# Altium PCB GP1247AI.PCBDOC (part 1 of 2)
Units mm, origin at the board's own origin, x right, y up, seen from the top; angles counter-clockwise.
Board outline 170 x 60 mm, 4 copper layers (Top Layer, Layer 1, Layer 2, Bottom Layer), stack 1.548 mm thick; 78 components, 46 nets, 283 pads, 156 vias.
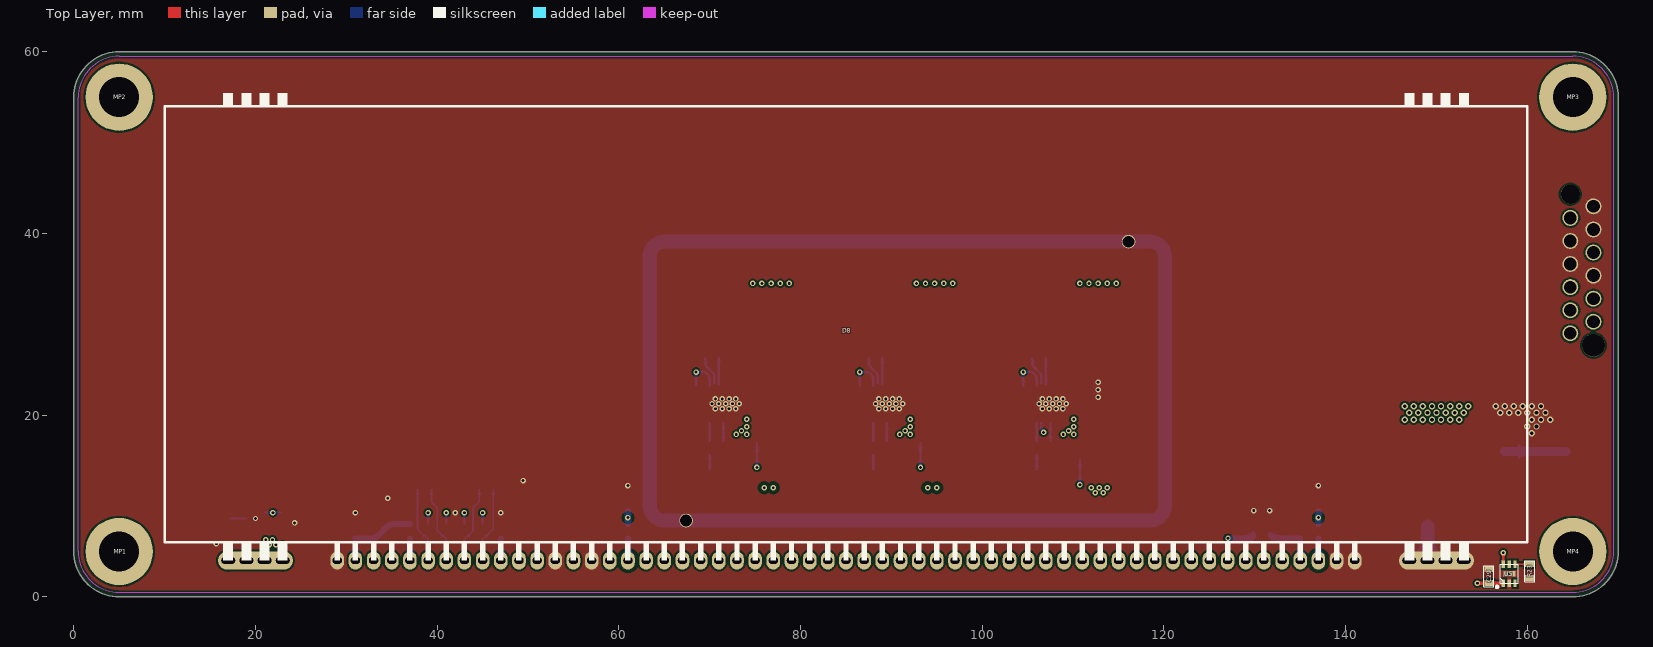
[diagram p0: Top Layer view]
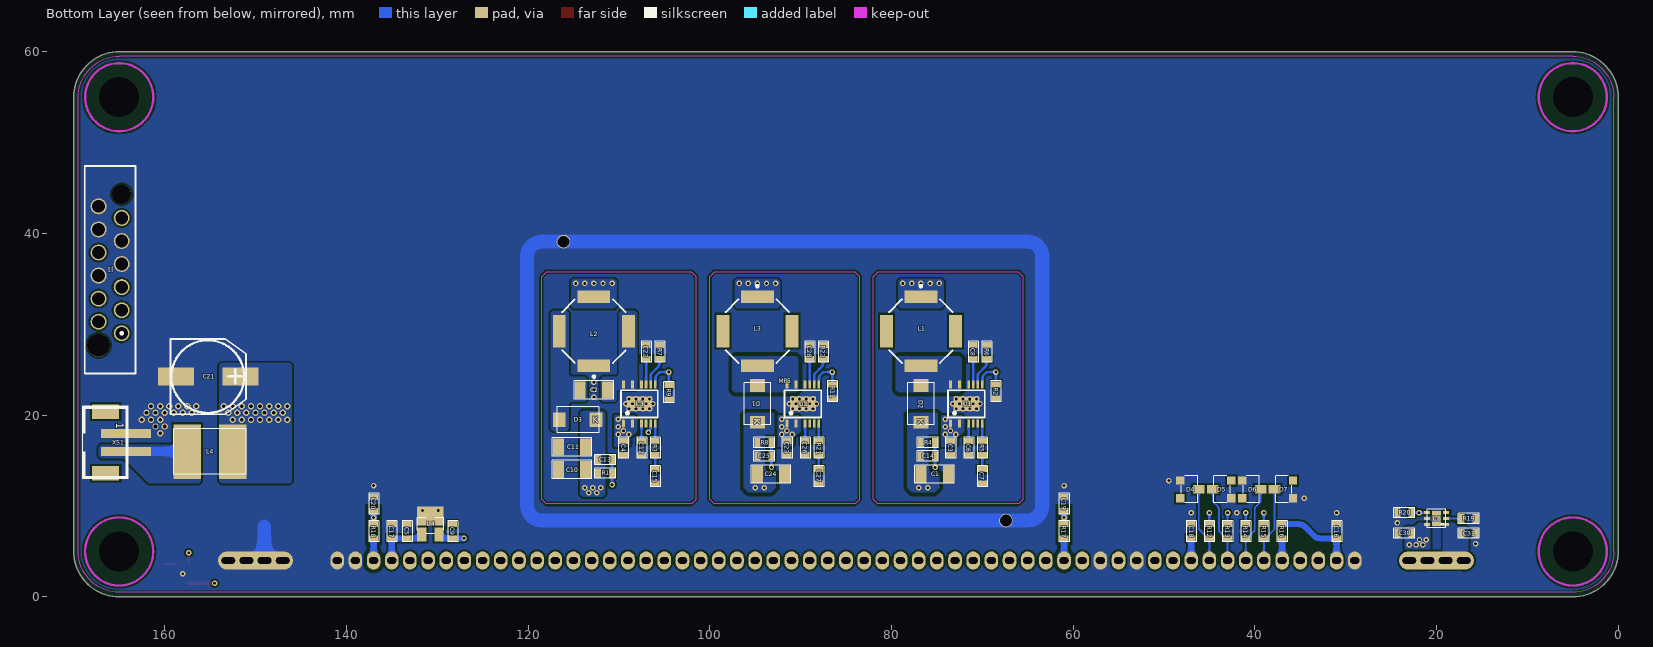
[diagram p1: Bottom Layer view, seen from below]
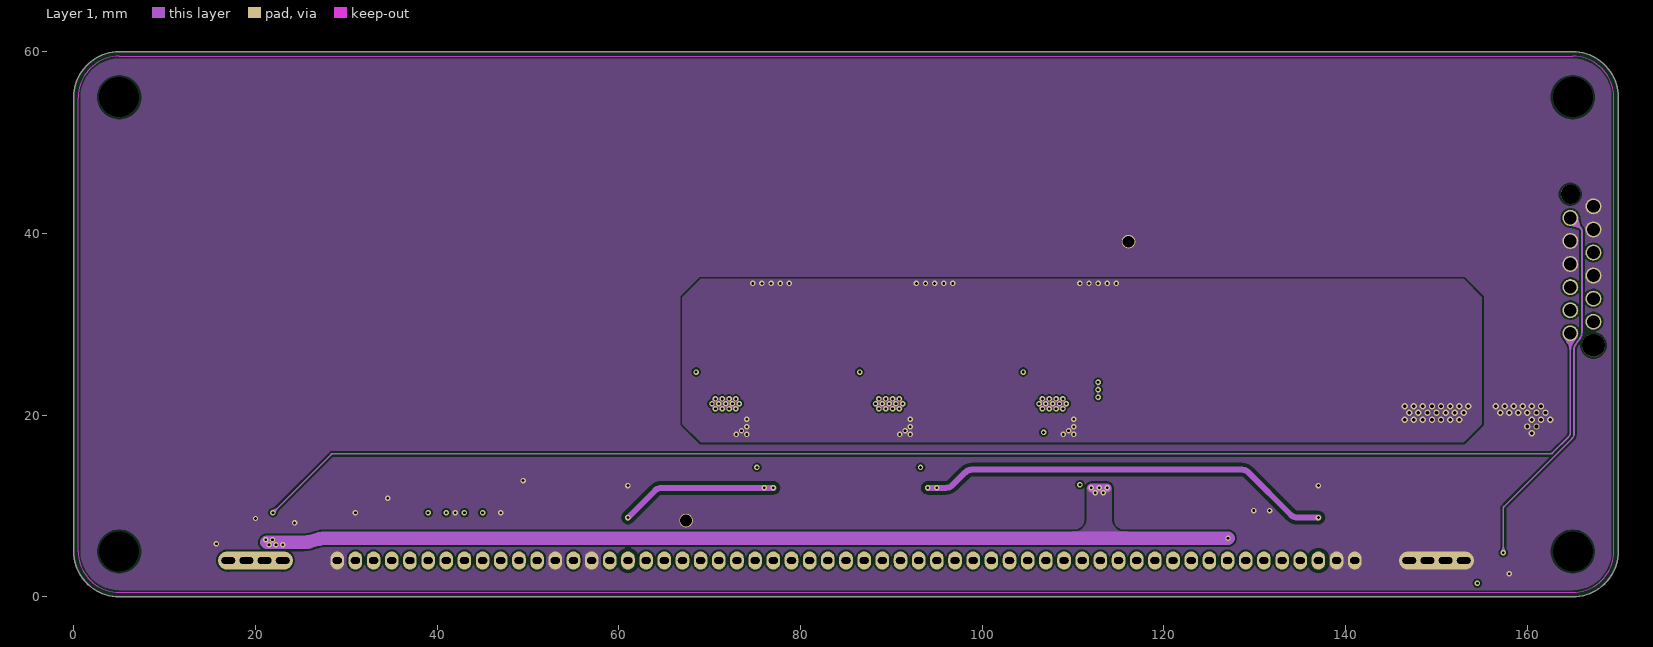
[diagram p2: Layer 1]
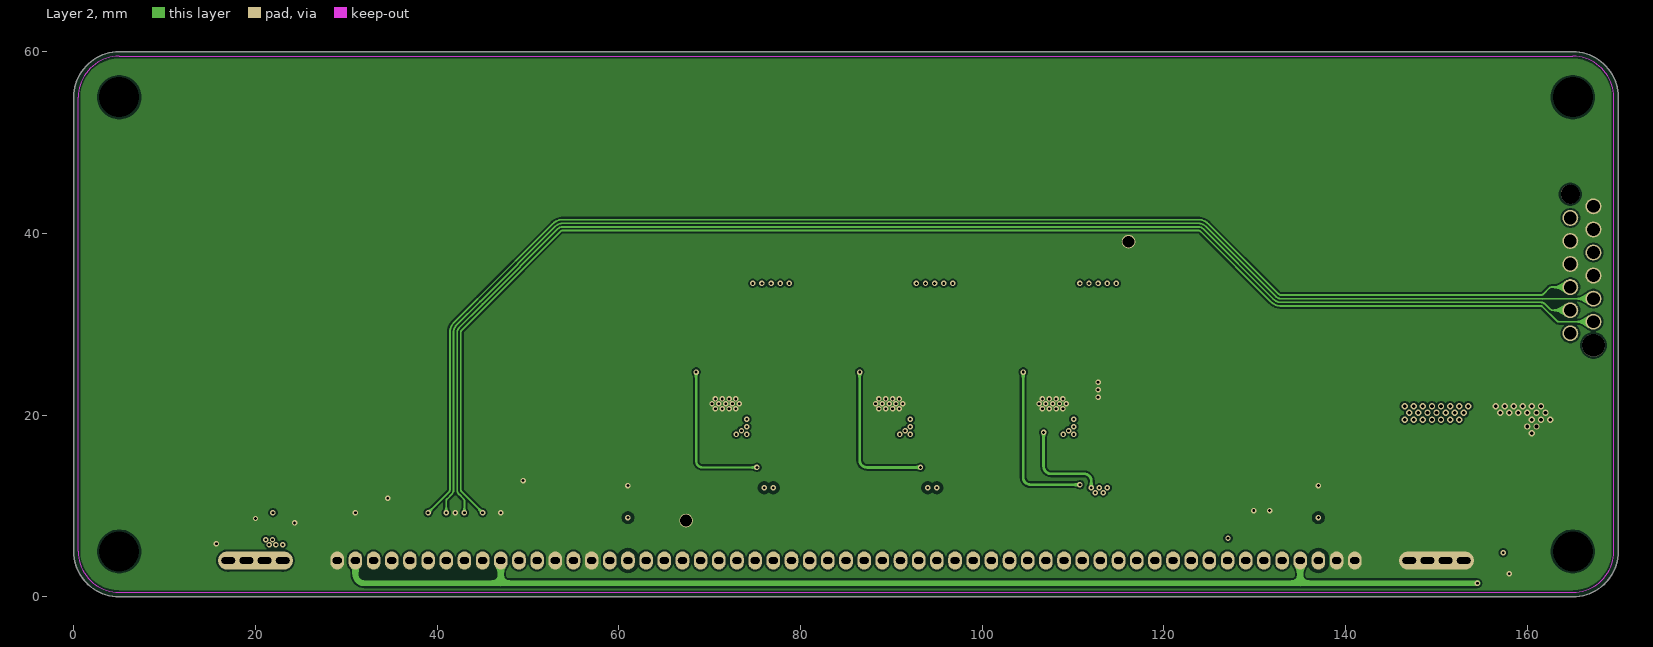
[diagram p3: Layer 2]
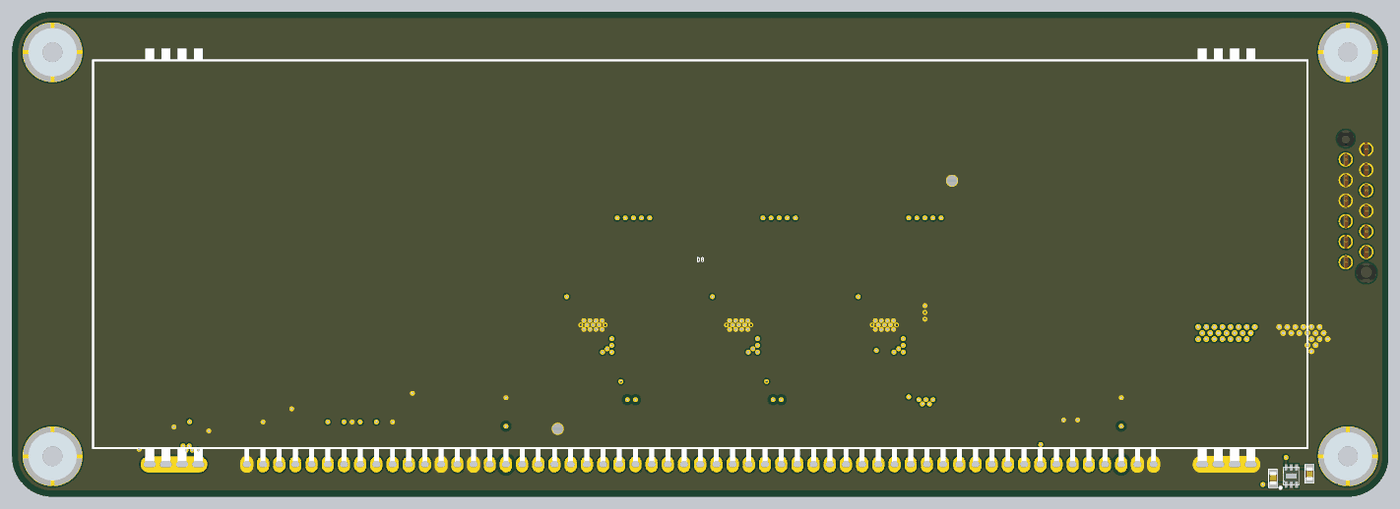
[diagram p4: 3D render of the assembled board from above, using the file's embedded part models]
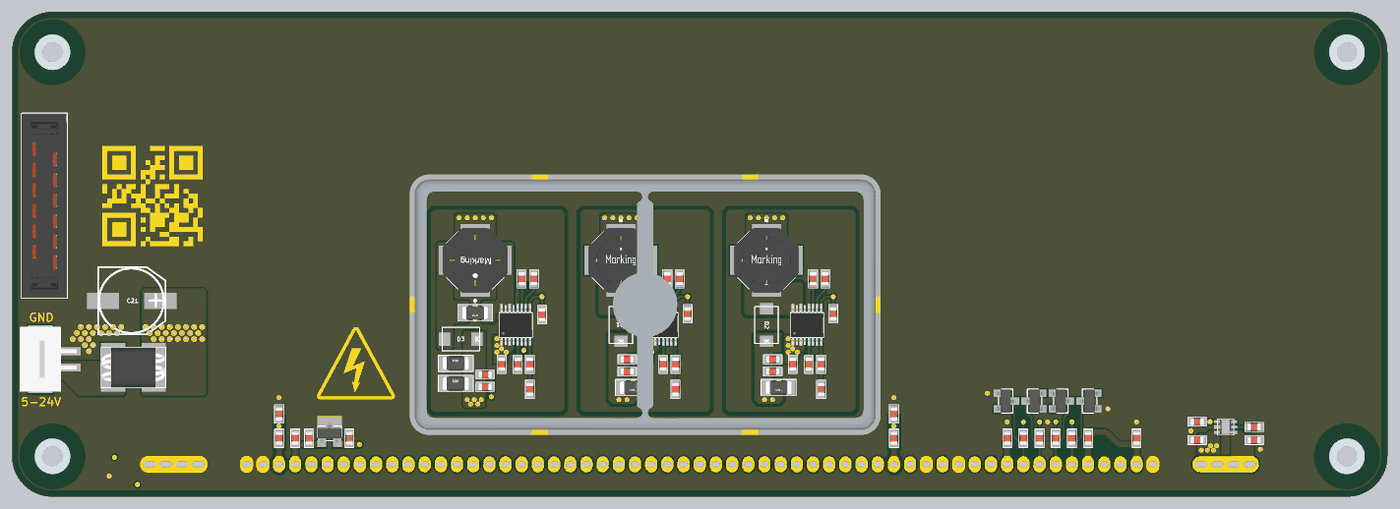
[diagram p5: 3D render of the assembled board from below, using the file's embedded part models]

## Layer stack, top to bottom
Top Solder: solder mask 0.0102, Solder Resist, Dk 3.5
Top Layer: signal copper 0.0356
Dielectric 2: prepreg 0.2083, PP-022, Dk 4.5
Layer 1: signal copper 0.035
Dielectric 1: core 0.9906, Core-042, Dk 4.6
Layer 2: signal copper 0.035
Dielectric 3: prepreg 0.2083, PP-022, Dk 4.5
Bottom Layer: signal copper 0.0356
Bottom Solder: solder mask 0.0102, Solder Resist, Dk 3.5

## Board outline
0,5 0,55 cw(c5,55) 5,60 165,60 cw(c165,55) 170,55 170,5 cw(c165,5) 165,0 5,0 cw(c5,5)

## Design rules (kind name [scope] priority, off if disabled: settings)
Clearance Clearance_1 [InNetClass('HIGH VOLTAGE')] p1: gap=0.4 ignorepadtopadclearanceinfootprint=FALSE
Clearance [All] p2: gap=0.2 ignorepadtopadclearanceinfootprint=TRUE except(0.15: SMDPad-Region)
HoleSize [All] p1: absolutevalues=TRUE maxlimit=5 minlimit=0.1 maxpercent=80.000 minpercent=20.000
MinimumSolderMaskSliver [All] p1: minsoldermaskwidth=0.05
PlaneConnect [All] p1: planeconnectstyle=Direct reliefexpansion=0.508 reliefentries=4 reliefconductorwidth=0.254 reliefairgap=0.254
PolygonConnect [All] p1: connectstyle=Direct reliefconductorwidth=0.254 reliefentries=4 polygonreliefangle="90 Angle" airgapwidth=0.254
RoomDefinition Connectors [InComponentClass('Connectors')] p1: confinementstyle=ConfineIn formatcopy=TRUE lockcomponents=FALSE outline 179,27 214,27 214,35 179,35
RoomDefinition Power [InComponentClass('Power')] p2: confinementstyle=ConfineIn formatcopy=TRUE lockcomponents=FALSE outline 178.943,51.435 194.564,51.435 194.564,57.277 178.943,57.277
RoutingVias [All] p1: holewidth=0.3 width=0.6 viastyle="Through Hole" minholewidth=0.2 minwidth=0.5 maxholewidth=1 maxwidth=1.5
SilkToSilkClearance [All] p1: silktosilkclearance=0.125
SolderMaskExpansion [IsVia] p1: expansion=0.08 istentingtop=FALSE soldermaskfromhole=TRUE
Width [All] p1: maxlimit=3 minlimit=0.125 preferedwidth=0.2
26 further rules are at their usual default settings.

## Classes and differential pairs
net class "HIGH VOLTAGE": NetD1_1 NetD2_1 NetD8_21 NetD8_59 VHG VHP
component class Power: C1 C2 C3 C4 C5 C6 C7 C8 C9 C10 C11 C12 C13 C14 C15 C22 C23 C24 C25 C26 C27 C28 D1 D2 D3 L1 L2 L3 MP5 R1 R2 R3 R4 R5 R6 R7 R8 R9 R11 R21 R22 U1 U2 U3 U4
component class Display: C16 C17 C18 C19 C20 C30 C31 D8 R16 R17 R18 R19 R20 U6
component class Connectors: C21 C29 D4 D5 D6 D7 J1 L4 MP1 MP2 MP3 MP4 R12 R13 R14 R15 R23 U5 XS1

## Components (designator, comment, footprint, x,y, rotation, side; value= is the part's Value field where it differs from the comment)
C1 "4.7µF/100V/X7S" 1206__R 73.753,13.5 r0 bottom
C2 "1µF/50V/X7R" 1206__R 111.251,22.75 r0 bottom
C3 "4.7µF/35V/0603" 0603__R 73.5,17.165 r270 bottom
C4 "4.7µF/35V/0603" 0603__R 109.5,17.165 r270 bottom
C5 "1µF/25V/X7R/0603" 0603__R 133.3,8 r270 bottom
C6 "1µF/50V/X5R/0603" 0603__R 71.5,15.616 r90 bottom
C7 "2.2NF/50V/0603" 0603__R 70,12.5 r90 bottom
C8 "2.2NF/50V/0603" 0603__R 71,27.75 r270 bottom
C9 "100NF/50V/0603" 0603__R 128.3,8 r270 bottom
C10 "47µF/25V/X5R" 1206__R 116.653,14 r180 bottom
C11 "47µF/25V/X5R" 1206__R 116.653,16.5 r180 bottom
C12 "1µF/50V/X5R/0603" 0603__R 107.5,15.616 r90 bottom
C13 "4.7pF/100V/0603" 0603__R 110.751,15.1 r0 bottom
C14 "4.7pF/100V/0603" 0603__R 75.201,15.5 r0 bottom
C15 "2.2NF/50V/0603" 0603__R 106,12.5 r90 bottom
C16 "100NF/50V/0603" 0603__R 31,8 r270 bottom
C17 "100NF/50V/0603" 0603__R 135,8 r270 bottom
C18 "100NF/50V/0603" 0603__R 47,8 r270 bottom
C19 "100NF/100V/0603" 0603__R 61,11 r270 bottom
C20 "100NF/100V/0603" 0603__R 137,11 r270 bottom
C21 "100µF/50V/ERS" AL-ERS8x8__R 158.75,24.25 r180 bottom
C22 "2.2NF/50V/0603" 0603__R 107,27.75 r270 bottom
C23 "4.7µF/35V/0603" 0603__R 91.5,17.165 r270 bottom
C24 "4.7µF/100V/X7S" 1206__R 91.753,13.5 r0 bottom
C25 "4.7pF/100V/0603" 0603__R 93.201,15.5 r0 bottom
C26 "1µF/50V/X5R/0603" 0603__R 89.5,15.616 r90 bottom
C27 "2.2NF/50V/0603" 0603__R 88,12.5 r90 bottom
C28 "2.2NF/50V/0603" 0603__R 89,27.75 r270 bottom
C29 "100NF/50V/0603" 0603__R 155.75,3.049 r270 top
C30 "100NF/50V/0603" 0603__R 24.299,7 r180 bottom
C31 "100NF/50V/0603" 0603__R 15.7,7 r0 bottom
D1 "STPS1H100A" SMA__R 94.75,21.25 r270 bottom
D2 "STPS1H100A" SMA__R 76.75,21.25 r270 bottom
D3 "STPS1H100A" SMA__R 114.535,19.5 r180 bottom
D4 "BZX84-C3V3" SOT-23-3__R 48.2,12.8 r180 bottom
D5 "BZX84-C3V3" SOT-23-3__R 42.6,10.87 r0 bottom
D6 "BZX84-C3V3" SOT-23-3__R 41.4,12.8 r180 bottom
D7 "BZX84-C3V3" SOT-23-3__R 35.8,10.87 r0 bottom
D8 "GP1247AI" GP1247AI 17,4 r0 top locked
J1 "490107671212" "490107671212_Permanent Application" 166,36 r270 bottom
L1 "6.8µH, 2.4A" WE-TPC_8020 76.75,29.25 r180 bottom
L2 "6.8µH, 1.45A" WE-TDC_8038 112.75,29.25 r0 bottom
L3 "6.8µH, 2.4A" WE-TPC_8020 94.75,29.25 r180 bottom
L4 "416Ohm, 5A" 7427511_WE-SUKW__R 155,16 r180 bottom
MP1 "M3, height 1mm" 9774010360_R 5,5 r0 top
MP2 "M3, height 1mm" 9774010360_R 5,55 r0 top
MP3 "M3, height 1mm" 9774010360_R 165,55 r0 top
MP4 "M3, height 1mm" 9774010360_R 165,5 r0 top
MP5 "3670570" 3670570 91.75,23.75 r0 bottom
R1 "1M00/0603" 0603__R 110.751,13.6 r0 bottom
R2 "33K0/0603" 0603__R 68.5,21.851 r90 bottom
R3 "100K/0603" 0603__R 106,15.616 r90 bottom
R4 "1M00/0603" 0603__R 75.201,17 r0 bottom
R5 "100K/0603" 0603__R 70,15.616 r90 bottom
R6 "20K0/0603" 0603__R 69.5,27.75 r270 bottom
R7 "20K0/0603" 0603__R 105.5,27.75 r270 bottom
R8 "1M00/0603" 0603__R 93.201,17 r0 bottom
R9 "470K/0603" 0603__R 104.5,21.75 r90 bottom
R11 "21K5/0603" 0603__R 86.5,21.851 r90 bottom
R12 "100R/0603" 0603__R 45,8 r270 bottom
R13 "100R/0603" 0603__R 43,6.451 r90 bottom
R14 "100R/0603" 0603__R 41,8 r270 bottom
R15 "100R/0603" 0603__R 39,6.451 r90 bottom
R16 "100K/0603" 0603__R 37,8 r270 bottom
R17 "10R0/0603" 0603__R 61,8 r270 bottom
R18 "10R0/0603" 0603__R 137,8 r270 bottom
R19 "43K0/0603" 0603__R 17.25,8.625 r180 bottom
R20 "100K/0603" 0603__R 22.75,9.275 r0 bottom
R21 "100K/0603" 0603__R 88,15.616 r90 bottom
R22 "20K0/0603" 0603__R 87.5,27.75 r270 bottom
R23 "100K/0603" 0603__R 160.25,3.6 r270 top
U1 "LT8361EMSE#PBF" MSOP-16/12__R 71.75,21.25 r90 bottom
U2 "LT8361EMSE#PBF" MSOP-16/12__R 89.75,21.25 r90 bottom
U3 "LT8361EMSE#PBF" MSOP-16/12__R 107.75,21.25 r90 bottom
U4 "LM3480IM3-3.3/NOPB" SOT-23-3_PW__R 130.75,7.881 r90 bottom
U5 "ISL76671AROZ-T7" SON65P210X200X80-7N 158,2.55 r90 top
U6 "NCP380HMUAJAATBG" SON65P200X200X55-7N 20,8.625 r0 bottom
XS1 "STIFTLEISTE_1X2_2MM_G_SMD" 1X2POL-2mm-G__R 169,17 r180 bottom

## Footprints (in the part's own frame and the unit in brackets; to place one, negate y for a bottom-side part, rotate by r counter-clockwise, add the part's x,y. Pads: shape width x height; smd on the part's side, far side on the other; paste and mask are expansions set on the pad)
1X2POL-2mm-G__R [mm] "JST: B2B-PH-SM4-TB(LF)(SN)"
  rect 3x1.6 smd: 0(2.5,-3.4) 0(2.5,3.4)
  rect 5.5x1 smd: 1(4.75,1) 2(4.75,-1)
  silkscreen extent -0.03,-4 5,3.98, body extent -0.03,-3.98 6.97,3.97, height 6.6
0603__R [mil]
  rect 26x39 smd: 1(0,0) 2(61,0)
  silkscreen extent -15,-22 76,22, body extent -15,-22 76,22, height 12
1206__R [mil]
  rect 47x74 smd: 1(0,0) 2(118,0)
  silkscreen extent -26,-40 144,40, body extent -26,-40 144,40, height 39
3670570 [mm] "Shielding Cabinet, SMT Frame Seamless, 57x31x6mm"
  round 1.5 hole 1.3: 1(-24.35,15.35) 1(24.35,-15.35)
  Top Layer region: -29.1,-1 -29.1,13.7 -29.1,13.936 -29.008,14.4 -28.827,14.837 -28.564,15.23 -28.23,15.564 -27.837,15.827 -27.4,16.008 -26.936,16.1 -26.7,16.1 -26.7,16.1 26.7,16.1 26.936,16.1 27.4,16.008 27.837,15.827 28.23,15.564 28.564,15.23 28.827,14.837 29.008,14.4 29.1,13.936 29.1,13.7 29.1,13.7 29.1,-1 27.6,-1 27.6,13.7 27.596,13.788 27.561,13.961 27.494,14.124 27.396,14.271 27.271,14.396 27.124,14.494 26.961,14.561 26.788,14.596 26.7,14.6 26.7,14.6 -26.7,14.6 -26.788,14.596 -26.961,14.561 -27.124,14.494 -27.271,14.396 -27.396,14.271 -27.494,14.124 -27.561,13.961 -27.596,13.788 -27.6,13.7 -27.6,13.7 -27.6,-1
  Top Layer region: -29.1,-0.25 -29.1,-13.7 -29.1,-13.936 -29.008,-14.4 -28.827,-14.837 -28.564,-15.23 -28.23,-15.564 -27.837,-15.827 -27.4,-16.008 -26.936,-16.1 -26.7,-16.1 -26.7,-16.1 -26.7,-16.1 26.7,-16.1 26.7,-16.1 26.936,-16.1 27.4,-16.008 27.837,-15.827 28.23,-15.564 28.564,-15.23 28.827,-14.837 29.008,-14.4 29.1,-13.936 29.1,-13.7 29.1,-13.7 29.1,-0.25 27.6,-0.25 27.6,-13.7 27.596,-13.788 27.561,-13.961 27.494,-14.124 27.396,-14.271 27.271,-14.396 27.124,-14.494 26.961,-14.561 26.788,-14.596 26.7,-14.6 26.7,-14.6 -26.7,-14.6 -26.788,-14.596 -26.961,-14.561 -27.124,-14.494 -27.271,-14.396 -27.396,-14.271 -27.494,-14.124 -27.561,-13.961 -27.596,-13.788 -27.6,-13.7 -27.6,-13.7 -27.6,-0.25
  body extent -28.5,-15.5 28.5,15.5, height 6
7427511_WE-SUKW__R [mm] "SMD EMI Suppression Ferrite Bead, body 5.5x5mm"
  rect 3x6 smd: 1(-2.5,0) 2(2.5,0)
  silkscreen extent -4,-2.5 4,2.5, body extent -4,-3 4,3, height 4.85
9774010360_R [mm] "M3 Thread Internal, Length 1mm"
  round 7.4 / inner round 0 / far side round 0 hole 4.4 unplated: 1(0,0)
  body extent -3,-3 3,3, height 1.01
"490107671212_Permanent Application" [mm] "REDFIT IDC SKEDD Connector, pitch 2.54mm, 12p"
  round 1.75 hole 1.4: 1(6.985,1.27) 2(5.715,-1.27) 3(4.445,1.27) 4(3.175,-1.27) 5(1.905,1.27) 6(0.635,-1.27) 7(-0.635,1.27) 8(-1.905,-1.27) 9(-3.175,1.27) 10(-4.445,-1.27) 11(-5.715,1.27) 12(-6.985,-1.27)
  round 2.1 hole 2.1 unplated: MH1(-8.315,1.27)
  round 2.5 hole 2.5 unplated: MH2(8.315,-1.27)
  silkscreen extent -11.41,-2.8 11.41,2.8, body extent -11.42,-2.8 11.41,2.8, height 10.5
AL-ERS8x8__R [mm]
  rect 4x2 smd: 1(0,0) 2(7.1,0)
  silkscreen extent -0.6,-4.15 7.7,4.15, body extent -2,-4.16 9.09,4.14, height 10.2
GP1247AI [mm]
  oval 2.25x2 hole 0.75 slot 1.5 at 0 deg mask+0.05: 1(0,0) 4(6,0) 62(130,0) 65(136,0)
  rect 4x2 hole 0.75 slot 1.5 at 0 deg mask+0.05: 2(2,0) 3(4,0) 63(132,0) 64(134,0)
  oval 1.5x2 hole 0.75 slot 1 at 0 deg mask+0.05: 5(12,0) 6(14,0) 7(16,0) 8(18,0) 9(20,0) 10(22,0) 11(24,0) 12(26,0) 13(28,0) 14(30,0) 15(32,0) 16(34,0) 17(36,0) 18(38,0) 19(40,0) 20(42,0) 21(44,0) 22(46,0) 23(48,0) 24(50,0) 25(52,0) 26(54,0) 27(56,0) 28(58,0) 29(60,0) 30(62,0) 31(64,0) 32(66,0) 33(68,0) 34(70,0) 35(72,0) 36(74,0) 37(76,0) 38(78,0) 39(80,0) 40(82,0) 41(84,0) 42(86,0) 43(88,0) 44(90,0) 45(92,0) 46(94,0) 47(96,0) 48(98,0) 49(100,0) 50(102,0) 51(104,0) 52(106,0) 53(108,0) 54(110,0) 55(112,0) 56(114,0) 57(116,0) 58(118,0) 59(120,0) 60(122,0) 61(124,0)
  silkscreen extent -7,0 143,51.45, body extent -7,2 143,50, height 10
MSOP-16/12__R [mm]
  oct 0.889x0.305 smd mask+0.025: 1(-2.15,1.75)
  rect 0.889x0.305 smd mask+0.025: 3(-2.15,0.75) 5(-2.15,-0.25) 6(-2.15,-0.75) 7(-2.15,-1.25) 8(-2.15,-1.75) 9(2.15,-1.75) 10(2.15,-1.25) 11(2.15,-0.75) 12(2.15,-0.25) 14(2.15,0.75) 16(2.15,1.75)
  rect 1.615x2.845 smd mask+0.025: 17(0,0)
  silkscreen extent -1.5,-2.02 1.5,2.02, body extent -2.45,-2.02 2.45,2.02, height 1.1
SMA__R [mm]
  rect 1.4x1.64 smd: 1(-2.015,0) 2(2.015,0)
  silkscreen extent -2.3,-1.45 2.3,1.45, body extent -2.72,-1.46 2.71,1.46, height 2.45
SON65P200X200X55-7N [mm]
  rect 0.7x0.35 smd mask+0.05: 1(-1.05,0.65) 2(-1.05,0) 3(-1.05,-0.65) 4(1.05,-0.65) 5(1.05,0) 6(1.05,0.65)
  rect 1x1.7 smd mask+0.05: 7(0,0)
  silkscreen extent -1,-1 1,1, body extent -1.05,-1 1.05,1, height 0.55
SON65P210X200X80-7N [mm]
  rect 0.8x0.35 smd: 1(-1.05,0.65) 2(-1.05,0) 3(-1.05,-0.65) 4(1.05,-0.65) 5(1.05,0) 6(1.05,0.65)
  rect 0.65x1.35 smd: 7(0,0)
  silkscreen extent -1.57,-1 1.05,1.45, body extent -1.1,-1 1.1,1, height 0.8
SOT-23-3__R [mil]
  rect 36x36 smd: 1(0,0) 2(0,-76)
  rect 50x36 smd: 3(80,-38)
  silkscreen extent 5,-96 75,20, body extent -9,-95 88,19, height 40
SOT-23-3_PW__R [mm]
  rect 1.5x1 smd mask+0.05: 1(-1.011,0.95) 2(-1.011,-0.95)
  rect 2.05x2.9 smd mask+0.05: 3(1.021,0)
  silkscreen extent -0.93,-1.45 0.85,1.45, body extent -1.25,-1.46 1.23,1.46, height 1.02
WE-TDC_8038 [mm] "SMT Shielded Coupled Inductor, 4-Leads, body 8x8mm"
  rect 3.6x1.4 smd: 1(0,3.8) 3(0,-3.8)
  rect 1.4x3.6 smd: 2(-3.8,0) 4(3.8,0)
  silkscreen extent -3.5,-3.5 3.5,5.12, body extent -4,-4 4,4, height 3.8
WE-TPC_8020 [mm] "Power Inductor, SMD, 4-Leads, body 8.0x8.0mm"
  rect 3.6x1.4 smd: 1(0,3.8) 2(0,-3.8)
  rect 1.4x3.6 smd: MP1(-3.8,0) MP2(3.8,0)
  silkscreen extent -3.5,-3.5 3.5,5.07, body extent -4,-4 4,4, height 1.8

## Part data
C1 C24: "Capacitor, 4.7µF/100V, 10%, Ceramic X7S, SMD, 1206", Manufacturer=Murata, Manufacturer Part Number=GRM31CC72A475KE11L, Supplier Part Number 1=490-18620-2-ND, ComponentLink1Description=https://search.murata.co.jp/Ceramy/image/img/A01X/G101/ENG/GRM31CC72A475KE11-01A.pdf?src-supplier=Digi-Key, ComponentLink1URL=https://search.murata.co.jp/Ceramy/image/img/A01X/G101/ENG/GRM31CC72A475KE11-01A.pdf?src-supplier=Digi-Key, Pricing 1="2000=0.29325 (USD)", RoHS Compliant=Yes, Stock=0, Supplier 1=Digi-Key, Text Field1=160347, Text Field7="Murata: GRM31CC72A475KE11L"
C2: library part 1µF/50V, "Capacitor, 1µF/50V, 10%, Ceramic X7R, SMD, 1206", Text Field1=80129, Text Field2=SMD, Text Field3=1206, Text Field4=1µF, Text Field5=50V, Text Field6=10%, Text Field7="1206, 50V, ±10%, X7R", Text Field8=10
C3 C4 C23: "Capacitor, 4.7µF, 35V, 10%, Ceramic X5R, SMD, 0603, Low ESR", Capacitance=4.7uF, Case Code (Imperial)=0603, Case Code (Metric)=1608, Dielectric=X5R, Dielectric Material=Ceramic, Manufacturer=TDK, Manufacturer Part Number=C1608X5R1V475K080AC, Max Operating Temperature=85°C, Min Operating Temperature=-55°C, Package Quantity=1, Supplier Part Number 1=445-9064-1-ND, Tolerance=10%, Voltage Rating=35V, Case/Package=0603, ComponentLink1Description=http://www.mouser.com/ds/2/400/lcc_commercial_general_en-837201.pdf?src-supplier=Mouser, ComponentLink1URL=http://www.mouser.com/ds/2/400/lcc_commercial_general_en-837201.pdf?src-supplier=Mouser, Depth=0.8mm, Height=0.8mm, Lead Free="Lead Free", Length=0.063inch, Mount="Surface Mount", Packaging="Tape and Reel", REACH SVHC="No SVHC", Resistor Type=Ceramic, RoHS Compliant=Yes, Series=C, Stock=37688, Supplier 1=Digi-Key, Termination=SMD/SMT, Text Field1=160313, Text Field7="TDK: C1608X5R1V475K080AC", Thickness=0.039inch, Voltage Rating (DC)=35V, Weight=7.1E-05oz, Width=0.031inch
C5: "Capacitor, 1µF, 25V, X7R, 10%, Ceramic, SMD, 0603", Capacitance=1µF, Manufacturer="Taiyo Yuden", Manufacturer Part Number=TMK107B7105KA-T, Operating Temperature="-55°C ~ 125°C", Package / Case="0603 (1608 Metric)", Ratings=-, Standard Package=1, Supplier Part Number 1=587-2984-2-ND, Temperature Coefficient=X7R, Tolerance=±10%, Voltage - Rated=25V, Applications="General Purpose", Catalog Drawings="xMK Series_0603_0.8", Category=Capacitors, ComponentLink1Description=https://datasheet.ciiva.com/15922/374tmk107b7105ka-t-15922376.pdf, ComponentLink1URL=https://datasheet.ciiva.com/15922/374tmk107b7105ka-t-15922376.pdf, ComponentLink2Description=https://datasheet.ciiva.com/30163/854tmk107b7105ka-t-30163691.pdf, ComponentLink2URL=https://datasheet.ciiva.com/30163/854tmk107b7105ka-t-30163691.pdf, ComponentLink3Description=https://datasheet.ciiva.com/2990/tmk107b7105ka-t-ss-2990064.pdf, ComponentLink3URL=https://datasheet.ciiva.com/2990/tmk107b7105ka-t-ss-2990064.pdf, ComponentLink4Description=https://datasheet.ciiva.com/133/tmk107b7105ka-t-ss-133732.pdf, ComponentLink4URL=https://datasheet.ciiva.com/133/tmk107b7105ka-t-ss-133732.pdf, Family="Ceramic Capacitors", Features=-, Height - Seated (Max)=-, Lead Spacing=-, Lead Style=-, Mounting Type="Surface Mount, MLCC", Online Catalog="M Series", Other Names=587-2984-6, Packaging=Digi-Reel®, Pricing 1="4000=0.0121, 8000=0.011, 12000=0.0105, 28000=0.01, 100000=0.0073 (USD)", Series=M, Size / Dimension="0.063\" L x 0.031\" W (1.60mm x 0.80mm)", Stock=1604000, Supplier 1=Digikey, Text Field1=138672, Text Field7="0603, 25V, ±10%, X7R", Thickness (Max)="0.035\" (0.90mm)"
C6 C12 C26: "Capacitor, 1µF, 50V, X5R, 10%, Ceramic, SMD, 0603", Text Field1=163284, Text Field2=SMD, Text Field3=0603, Text Field4=1µF, Text Field5=50V, Text Field6=X5R, Text Field7="0603, 50V, ±10%, X5R", Text Field8=4
C7 C8 C15 C22 C27 C28: "Capacitor, 2.2nF, 50V, 10%, Ceramic, SMD, 0603", Manufacturer=KEMET, Manufacturer Part Number="C0603C222K5RAC   TU", Supplier Part Number 1=1167798, ComponentLink1Description=http://www.kemet.com/kemet/web/homepage/kechome.nsf/vapubfiles/KEM_C1002_X7R_SMD.pdf/$file/KEM_C1002_X7R_SMD.pdf, ComponentLink1URL=http://www.kemet.com/kemet/web/homepage/kechome.nsf/vapubfiles/KEM_C1002_X7R_SMD.pdf/$file/KEM_C1002_X7R_SMD.pdf, ComponentLink2Description=http://www.farnell.com/cad/1455899.zip, ComponentLink2URL=http://www.farnell.com/cad/1455899.zip, Pricing 1="1=0,009, 10=0,009, 100=0,008, 500=0,006, 1000=0,005, 2500=0,005 (EUR)", RoHS=YES, Stock 1=3711, Supplier 1=Farnell, Text Field1=102033, Text Field7="0603, 50V, ±10%, X5R"
C9 C16 C17 C18 C29 C30 C31: "Capacitor, 100nF, 50V, 10%, Ceramic XR7, SMD, 0603", Betriebstemperaturbereich="-55°C bis +125", Capacitor Terminals=SMD, Kapazitätstoleranz="± 10%", Manufacturer=KEMET, Manufacturer Part Number=C0603X104K5RACTU, Min Betriebstemperatur=-55, Supplier Part Number 1=1414028, Temperatur, Betriebs- max.=125, Toleranz +=10%, Anschlusstyp="Surface Mount (SMD, SMT)", Breite/Weite=0.8, ComponentLink1Description=http://www.farnell.com/datasheets/75233.pdf, ComponentLink1URL=http://www.farnell.com/datasheets/75233.pdf, ComponentLink2Description=http://www.farnell.com/cad/1558668.zip, ComponentLink2URL=http://www.farnell.com/cad/1558668.zip, Dielektrische Charakteristik=X7R, Gehäusetyp=0603, Kapazitätswert=0.1, Kondensatorgehäusestil="0603 [1608 Metric]", Länge/Höhe, Außen-=1.6, Nennspannung=50, Pin, Anzahl der=2, Pricing 1="10=0,084, 100=0,042, 500=0,029, 1000=0,021, 4000=0,016 (EUR)", RoHS=YES, Serie=FT, Stock 1=97613, Supplier 1=Farnell, SVHC="No SVHC (18-Jun-2012)", Text Field1=113024, Text Field7="0603, 50V, ±10%, X7R", Tiefe, Außen=0.8, Toleranz -=10%, VDC Nennspannung=50
C10 C11: "Capacitor, 47µF/25V, 20%, Ceramic X5R, SMD, 1206", Capacitance=47uF, Case Code (Imperial)=1206, Case Code (Metric)=3216, Dielectric=X5R, Dielectric Material=Ceramic, Manufacturer=TDK, Manufacturer Part Number=C3216X5R1E476M160AC, Max Operating Temperature=85°C, Min Operating Temperature=-55°C, Package Quantity=1, Supplier Part Number 1=445-8047-2-ND, Tolerance=20%, Voltage=25V, Case/Package=1206, ComponentLink1Description=https://product.tdk.com/info/en/documents/chara_sheet/C3216X5R1E476M160AC.pdf?src-supplier=Digi-Key, ComponentLink1URL=https://product.tdk.com/info/en/documents/chara_sheet/C3216X5R1E476M160AC.pdf?src-supplier=Digi-Key, ComponentLink2Description=https://product.tdk.com/info/en/catalog/datasheets/mlcc_commercial_general_en.pdf?src-supplier=Digi-Key, ComponentLink2URL=https://product.tdk.com/info/en/catalog/datasheets/mlcc_commercial_general_en.pdf?src-supplier=Digi-Key, ComponentLink3Description=http://www.tdk.com/pdf/general_B11.pdf?src-supplier=Future+Electronics, ComponentLink3URL=http://www.tdk.com/pdf/general_B11.pdf?src-supplier=Future+Electronics, Composition=Ceramic, Depth=1.6mm, Height=1.6mm, Lead Free="Lead Free", Length=3.2mm, Mount="Surface Mount", Packaging="Tape and Reel", Pricing 1="2000=0.385, 4000=0.37125, 10000=0.3575, 14000=0.35063 (USD)", REACH SVHC="No SVHC", Stock=216000, Supplier 1=Digi-Key, Termination=SMD/SMT, Text Field1=153145, Text Field7="TDK: C3216X5R1E476M160AC", Thickness=1.6mm, Voltage Rating=25V, Voltage Rating (DC)=25V, Weight=0.000571oz, Width=0.063inch
C13 C14 C25: library part 4.7NF/50V/0603, "Capacitor, 4.7pF, 100V, 10%, Ceramic, SMD, 0603", Text Field1=87196, Text Field2=SMD, Text Field3=0603, Text Field4=4.7nF, Text Field5=50V, Text Field6=10%, Text Field7="0603,50V, ±10%, X7R", Text Field8=4
C19 C20: library part 100NF/50V/0603, "Capacitor, 100nF, 100V, 10%, Ceramic XR7, SMD, 0603", Betriebstemperaturbereich="-55°C bis +125", Capacitor Terminals=SMD, Kapazitätstoleranz="± 10%", Manufacturer=KEMET, Manufacturer Part Number=C0603X104K5RACTU, Min Betriebstemperatur=-55, Supplier Part Number 1=1414028, Temperatur, Betriebs- max.=125, Toleranz +=10%, Anschlusstyp="Surface Mount (SMD, SMT)", Breite/Weite=0.8, ComponentLink1Description=http://www.farnell.com/datasheets/75233.pdf, ComponentLink1URL=http://www.farnell.com/datasheets/75233.pdf, ComponentLink2Description=http://www.farnell.com/cad/1558668.zip, ComponentLink2URL=http://www.farnell.com/cad/1558668.zip, Dielektrische Charakteristik=X7R, Gehäusetyp=0603, Kapazitätswert=0.1, Kondensatorgehäusestil="0603 [1608 Metric]", Länge/Höhe, Außen-=1.6, Nennspannung=50, Pin, Anzahl der=2, Pricing 1="10=0,084, 100=0,042, 500=0,029, 1000=0,021, 4000=0,016 (EUR)", RoHS=YES, Serie=FT, Stock 1=97613, Supplier 1=Farnell, SVHC="No SVHC (18-Jun-2012)", Text Field1=113024, Text Field7="0603, 50V, ±10%, X7R", Tiefe, Außen=0.8, Toleranz -=10%, VDC Nennspannung=50
C21: "Capacitor, 100µF, Low ESR, 105 °C, 50V, 20%, Al-Elektrolyt, SMD, Größe ERS8x8", Text Field1=80894, Text Field2=SMD, Text Field3="Größe ERS8x8", Text Field4="100µF/ERS Low ESR", Text Field5=50V, Text Field6=20%, Text Field7=Al-Elektrolyt
D1 D2 D3: "DIODE SCHOTTKY 100V 1A SMA", Capacitance @ Vr, F=-, Current - Average Rectified (Io)=1A, Current - Reverse Leakage @ Vr="4µA @ 100V", Manufacturer=STMicroelectronics, Package / Case="DO-214AC, SMA", Supplier Device Package=SMA, Supplier Part Number 1=497-3209-6-ND, Voltage - DC Reverse (Vr) (Max)=100V, Voltage - Forward (Vf) (Max) @ If="770mV @ 1A", Category="Discrete Semiconductor Products", ComponentLink1Description=http://www.st.com/internet/com/TECHNICAL_RESOURCES/TECHNICAL_LITERATURE/DATASHEET/CD00001304.pdf, ComponentLink1URL=http://www.st.com/internet/com/TECHNICAL_RESOURCES/TECHNICAL_LITERATURE/DATASHEET/CD00001304.pdf, Diode Type=Schottky, Manufacturer Part Number=STPS1H100A, Mounting Type="Surface Mount", Packaging=Digi-Reel®, Pricing 1="1=0.41, 10=0.345, 25=0.3024, 100=0.259, 250=0.2246, 500=0.19026, 1000=0.14667, 2500=0.1341 (EUR)", Reverse Recovery Time (trr)=-, RoHS="RoHS Compliant", Speed="Fast Recovery =< 500ns, > 200mA (Io)", Stock 1=111470, Supplier 1=Digi-Key, Text Field1=111565, Text Field7="STMicroelectronics: STPS1H100A"
D4 D5 D6 D7: "DIODE ZENER 3.3V 250MW SOT23", Current - Reverse Leakage @ Vr="5µA @ 1V", Manufacturer="Nexperia USA Inc.", Manufacturer Part Number=BZX84-C3V3,215, Operating Temperature="-65°C ~ 150°C", Package / Case="TO-236-3, SC-59, SOT-23-3", Power - Max=250mW, Supplier Device Package="TO-236AB (SOT23)", Supplier Part Number 1=1727-2937-2-ND, Tolerance=±5%, Voltage - Forward (Vf) (Max) @ If="900mV @ 10mA", Category="Discrete Semiconductor Products", ComponentLink1Description=http://assets.nexperia.com/documents/data-sheet/BZX84_SER.pdf, ComponentLink1URL=http://assets.nexperia.com/documents/data-sheet/BZX84_SER.pdf, Mounting Type="Surface Mount", Packaging="Tape & Reel (TR)", Part Status=Active, Pricing 1="3000=0.02273, 6000=0.0205, 15000=0.01782, 30000=0.01604, 75000=0.01426, 150000=0.01185 (EUR)", RoHS="RoHS Compliant", Stock 1=0, Supplier 1=Digi-Key, Text Field1=139997, Text Field7="Nexperia: BZX84-C3V3,215"
D8: "253*63 Pixels SPI VFD Matrix Display"
J1: "WR-WST REDFIT IDC SKEDD, pitch 2.54mm, 12p", Contact Resistance=10mΩ, Manufacturer="Wurth Elektronik", Operating Temperature Max=105°C, Operating Temperature Min=-25°C, Rated Current=1A, Working Voltage=100VAC, Category="Wire-to-Board Connectors", ComponentLink1Description="Website Link", ComponentLink1URL=https://www.we-online.com/redexpert/article/490107671212?ad, ComponentLink2Description="Datasheet Link", ComponentLink2URL=https://www.we-online.com/redexpert/spec/490107671212?ad, Gender=Transition, Manufacturer Part Number=490107671212, Match Code=WR-WST, Mount="Press Fit", Number of Pins=12, Packaging=Tube, Pitch=2.54mm
L1 L3: library part 7440700068, "WE-TPC SMT Tiny Power Inductor, size 8020, 6.8µH, 2.4A, 68mΩ", Case/Size Code=8020, DC Resistance=56mΩ, DC Resistance Max=68mΩ, Inductance=6.8µH, Manufacturer="Wurth Elektronik", Operating Temperature Max=125°C, Operating Temperature Min=-40°C, Rated Current=2.4A, Saturation Current=1.8A, Self Resonant Frequency=55MHz, Category="Shielded Power Inductors", ComponentLink1Description="Website Link", ComponentLink1URL=https://www.we-online.com/redexpert/article/7440700068?ad, ComponentLink2Description="Datasheet Link", ComponentLink2URL=https://www.we-online.com/redexpert/spec/7440700068?ad, Height=1.8mm, Length=8mm, Manufacturer Part Number=7440700068, Match Code=WE-TPC, Mount="Surface Mount", Packaging="Tape and Reel", Width=8mm
L2: library part 74489440068, "WE-TDC SMT Shielded Coupled Inductor, size 8038, 6.8µH, 1.45A, 100mΩ", Case/Size Code=8038, DC Resistance 1=88mΩ, DC Resistance Max 1=100mΩ, Inductance 1=6.8µH, Manufacturer="Wurth Elektronik", Operating Temperature Max=125°C, Operating Temperature Min=-40°C, Rated Current 1=1.45A, Rated Voltage=80V, Saturation Current=3.2A, Self Resonant Frequency=25MHz, Category="Coupled Power Inductors", ComponentLink1Description="Website Link", ComponentLink1URL=https://www.we-online.com/redexpert/article/74489440068?ad, ComponentLink2Description="Datasheet Link", ComponentLink2URL=https://www.we-online.com/redexpert/spec/74489440068?ad, DC Resistance 2=88mΩ, DC Resistance Max 2=100mΩ, Height=3.8mm, Inductance 2=6.8µH, Length=8mm, Manufacturer Part Number=74489440068, Match Code=WE-TDC, Mount="Surface Mount", Packaging="Tape and Reel", Rated Current 2=1.45A, Width=8mm
L4: library part 7427511, "WE-SUKW SMT EMI Suppression 5-Hole Ferrite Bead, , 416Ohm, 5A", DC Resistance max.=11mOhm, Manufacturer="Wurth Elektronik", Operating Temperature="-40 to +125degC", Rated Current=5A, ComponentLink1Description=Manufacturer, ComponentLink1URL=http://www.we-online.de, ComponentLink2Description=Datasheet, ComponentLink2URL=https://www.we-online.com/catalog/datasheet/7427511.pdf, Height=4.6mm, Impedance @25MHz=272Ohm, Impedance @100MHz=416Ohm, Impedance max.=440Ohm, Impedance max. Test Condition=100MHz, Length=8mm, Manufacturer Part Number=7427511, Mounting Technology=SMT, Packaging="Tape and Reel", Published Date="April 2020", Text Field1=156774, Text Field7="Würth: 7427511", Width=5mm
MP1 MP2 MP3 MP4: library part 9774010360, "SMT Steel Spacer with internal Thread M3 WA-SMSI, height 1mm", Manufacturer="Wurth Electronics", Operating Temperature="-55 to 150 degC", Supplier Part Number 1=710-9774010360, ComponentLink1Description=Manufacturer, ComponentLink1URL=http://www.we-online.de, ComponentLink2Description=Datasheet, ComponentLink2URL=https://katalog.we-online.de/em/datasheet/9774010360.pdf, Manufacturer Part Number=9774010360, Material=Steel, Mounting Technology=SMT, Packaging=Bulk, Part Number=9774010360, Pricing 1="1=2.54, 10=2.41, 50=2.28, 100=2.11, 1000=2.11, 10000=2.11 (USD)", Published Date="November 2018", Publisher="Wurth Elektronik", Solder Cream Thickness="150 um", Stock=200, Supplier 1=Mouser, Surface=Tin, Text Field1=148883, Text Field7="Würth: 9774010360", Thread=M3, Tightening Torque="0.5 Nm"
MP5: "WE-SHC Shielding Cabinet, SMT Frame Seamless, Tin Plated, Tray, 57x31x6mm", Manufacturer="Wurth Elektronik", Operating Temperature Max=125°C, Operating Temperature Min=-40°C, Base Material=Steel, Category="EMC Shielding", ComponentLink1Description="Website Link", ComponentLink1URL=https://www.we-online.com/redexpert/article/3670570?ad, ComponentLink2Description="Datasheet Link", ComponentLink2URL=https://www.we-online.com/redexpert/spec/3670570?ad, Height=6mm, Length=57mm, Manufacturer Part Number=3670570, Match Code=WE-SHC, Mount="Surface Mount", Packaging=Tray, Plating="Tin Plated", Type="SMT Frame Seamless", Width=31mm
R1 R4 R8: "Resistor, 1M00, 0,1 W, 1,0 %, TK50, Metallschicht, SMD, 0603", Text Field1=69900, Text Field2=SMD, Text Field3=0603, Text Field4=1M00, Text Field5=0.1W, Text Field6="1%, TK100", Text Field7="0603, 0,1 W, 1,0 %, TK50", Text Field8=4
R2: "Resistor, 33K, 0,1 W, 1,0 %, TK50, Metallschicht, SMD, 0603", Text Field1=86418, Text Field2=SMD, Text Field3=0603, Text Field4=33K, Text Field5=0.1W, Text Field6=TK100, Text Field7="0603, 0,1 W, 1,0 %, TK50", Text Field8=4
R3 R5 R16 R20 R21 R23: "Resistor, 100K, 0.1W, 1%, TK50, Metallschicht, SMD, 0603", Text Field1=70755, Text Field2=SMD, Text Field3=0603, Text Field4=100K, Text Field5=0.1W, Text Field6="1%, TK50", Text Field7="0603, 0,1 W, 1,0 %, TK50", Text Field8=4
R6 R7 R22: "Resistor, 20K0, 0.063W, 1%, TK100, Metallschicht, SMD, 0603", Text Field1=82523, Text Field2=SMD, Text Field3=0603, Text Field4=20K0, Text Field5=0.063W, Text Field6="1%, TK100", Text Field7="0603, 0,1 W, 1,0 %, TK100", Text Field8=4
R9: "Resistor, 470K, 0.1W, 1%, TK50, Metallschicht, SMD, 0603", Text Field1=114671, Text Field2=SMD, Text Field3=0603, Text Field4=470K, Text Field5=0.1W, Text Field6="1%, TK50", Text Field7="0603, 0,1 W, 1,0 %, TK50", Text Field8=4
R11: library part 22K0/0603, "Resistor, 21K5, 0.1W, 1%, TK50, Metallschicht, SMD, 0603", Text Field1=73115, Text Field2=SMD, Text Field3=0603, Text Field4=22K0, Text Field5=0.1W, Text Field6="1%, TK50", Text Field7="0603, 0,1 W, 1,0 %, TK50", Text Field8=4
R12 R13 R14 R15: "Resistor, 100R, 0.1W, 1%, TK50, Metallschicht, SMD, 0603", Text Field1=67270, Text Field7="0603, 0,1 W, 1,0 %, TK50"
R17 R18: "Resistor, 10R0, 0.063W, 1%, TK200, Metallschicht, SMD, 0603", Manufacturer=VISHAY, Manufacturer Part Number="MCT 0603-50 1% P5 10R0", Power Rating=100, Resistance=10, Resistance Tolerance="± 1%", Resistor Case Style="0603 [1608 Metric]", Resistor Element Material="Thin Film", Supplier Part Number 1=06X6013, ComponentLink1Description=http://www.farnell.com/datasheets/1718110.pdf, ComponentLink1URL=http://www.farnell.com/datasheets/1718110.pdf, Pricing 1="50=0,063, 250=0,048, 500=0,042, 1000=0,038, 5000=0,035 (USD)", Product Range="VISHAY - MCT Series", RoHS=YESX, Stock 1=4700, Supplier 1=Newark, Text Field1=70916, Text Field7="0603, 0,063W, 1,0 %, TK200"
R19: "Resistor, 43K0, 0,1 W, 1,0 %, TK50,  Metallschicht, SMD, 0603", Text Field1=69417, Text Field2=SMD, Text Field3=0603, Text Field4=43K0, Text Field5=0,1W, Text Field6="1%, TK50", Text Field7="0603, 0,1 W, 1,0 %, TK50", Text Field8=4
U1 U2 U3: "Conv DC-DC 2.8V to 60V Step Up Single-Out 100V 2A Automotive 12-Pin MSOP EP Tube", Manufacturer_Name="Analog Devices", Mouser Part Number=584-LT8361EMSE#PBF, Datasheet Link=https://www.mouser.fi/datasheet/2/609/lt8361-1568840.pdf, Geometry.Height=1.1mm, Manufacturer_Part_Number=LT8361EMSE#PBF, Mouser Price/Stock=https://www.mouser.co.uk/ProductDetail/Analog-Devices/LT8361EMSEPBF?qs=y6ZabgHbY%252ByVuSTCW6h07w%3D%3D
U4: "LDO, SOT-23, 3V3 OUT 100mA, Vinmax 30V, SMD", Current - Limit (Min)=-, Current - Output=100mA, Manufacturer="Texas Instruments", Operating Temperature="-40°C ~ 125°C", Package / Case="TO-236-3, SC-59, SOT-23-3", Supplier Device Package=SOT-23-3, Supplier Part Number 1=LM3480IM3-3.3/NOPBTR-ND, Voltage - Dropout (Typical)="0.9V @ 100mA", Voltage - Input="Up to 30V", Voltage - Output=3.3V, Category="Integrated Circuits (ICs)", ComponentLink1Description=http://www.ti.com/lit/ds/symlink/lm3480.pdf, ComponentLink1URL=http://www.ti.com/lit/ds/symlink/lm3480.pdf, Manufacturer Part Number=LM3480IM3-3.3/NOPB, Mounting Type="Surface Mount", Number of Regulators=1, Packaging="Tape & Reel (TR)", Part Status=Active, Pricing 1="1000=0.3183 (EUR)", Regulator Topology="Positive Fixed", RoHS="RoHS Compliant", Stock 1=23000, Supplier 1=Digi-Key, Text Field1=131797, Text Field7="TI: LM3480IM3-3.3/NOPB"
U5: "Light to Analog Sensors (Voltage) Low Power, <100 Lux Optimized, Analog Output Ambient Light Sensor", Manufacturer_Name="Renesas Electronics", Mouser Part Number=968-ISL76671AROZ-T7, Datasheet Link=https://www.renesas.com/en-us/www/doc/datasheet/isl76671.pdf, Geometry.Height=0.8mm, Manufacturer_Part_Number=ISL76671AROZ-T7, Mouser Price/Stock=https://www.mouser.co.uk/ProductDetail/Renesas-Intersil/ISL76671AROZ-T7?qs=9fLuogzTs8KH%2F0coQfRtPw%3D%3D
U6: "ON SEMICONDUCTOR - NCP380HMUAJAATBG - Power Load Switch, Current Limiting, High Side, Active High, 1 Output, 5.5V, UDFN-6", Manufacturer_Name=onsemi, Mouser Part Number=863-NCP380HMUAJAATBG, Datasheet Link=http://www.onsemi.com/pub/Collateral/NCP380-D.PDF, Geometry.Height=0.55mm, Manufacturer_Part_Number=NCP380HMUAJAATBG, Mouser Price/Stock=https://www.mouser.co.uk/ProductDetail/onsemi/NCP380HMUAJAATBG?qs=YeOvDzlQW72pe7df1sK96A%3D%3D
XS1: Color=Natural, Manufacturer="JST Sales America Inc", Manufacturer Part Number=B2B-PH-SM4-TB(LF)(SN), Supplier Part Number 1=455-1734-1-ND, Category="Connectors, Interconnects", ComponentLink1Description=http://www.jst-mfg.com/product/pdf/eng/ePH.pdf, ComponentLink1URL=http://www.jst-mfg.com/product/pdf/eng/ePH.pdf, Connector Type="Header, Shrouded", Contact Finish=Tin, Contact Type="Male Pin", Features="Solder Retention", Mounting Type="Surface Mount", Number of Positions=2, Number of Positions Loaded=All, Number of Rows=1, Packaging="Cut Tape (CT)", Pitch="0.079\" (2.00mm)", Pricing 1="1=0.41, 10=0.38, 50=0.3038, 100=0.291, 250=0.26576, 500=0.25308 (EUR)", RoHS="RoHS Compliant", Supplier 1=Digi-Key, Termination=Solder, Text Field1=121631, Text Field7="JST: B2B-PH-SM4-TB(LF)(SN)"

## Via types
v1: diameter 0.6, hole 0.3, Top Layer to Bottom Layer, 116 vias
v2: diameter 0.7, hole 0.4, Top Layer to Bottom Layer, 40 vias

## Nets (pads, with @x,y where several pads share a name; then routed paths per layer and width w, separated by ;. In a path a pad name is that pad's centre, name@x,y a point inside that pad or via, vN(x,y) a via of type N, cw(c..) or ccw(c..) an arc to the next point about the centre after c; other vN are vias at no path point)
CS: D5.3 D8.12 R13.1 | length 8.5
  Bottom Layer w0.2: D8.12 R13.1 43.395,6.681 43.863,7.148 ccw(c43.65,7.36) 43.95,7.36 43.95,9.687 cw(c44.25,9.687) 44.037,9.899 44.545,10.406 ccw(c44.332,10.618) 44.632,10.618 D5.3
DIS_RST: D7.3 D8.10 R15.1 | length 8.4
  Bottom Layer w0.2: D7.3 37.832,7.578 ccw(c38.132,7.578) 37.921,7.365 38.605,6.681 R15.1 D8.10
FIL_EN: J1.1 R20.1 U6.4 | length 159.2
  Layer 1 w0.2: v1(21.925,9.275) 28.313,15.663 cw(c28.524,15.45) 28.524,15.75 162.551,15.75 ccw(c162.551,16.05) 162.762,15.837 164.556,17.631 ccw(c164.13,18.054) 164.73,18.054 164.73,18.17 J1.1
  Bottom Layer w0.2: U6.4 R20.1
GND: C1.1 C3.2 C4.2 C5.1 C6.1 C7.1 C8.1 C10.1 C11.1 C12.1 C15.1 C16.1 C17.1 C18.1 C19.1 C20.1 C21.1 C22.1 C23.2 C24.1 C26.1 C27.1 C28.1 C29.1 C30.1 C31.1 D4.1 D5.1 D6.1 D7.1 D8.5 D8.17 D8.19 D8.60 D8.61 D8.62 D8.63 D8.64 D8.65 J1.6 J1.7 J1.9 J1.10 J1.12 L2.1 MP5.1 R2.1 R6.1 R7.1 R9.1 R11.1 R19.2 R20.2 R22.1 R23.2 U1.7 U1.12 U1.17 U2.7 U2.12 U2.17 U3.12 U3.17 U4.3 U5.2 U5.7 U6.5 U6.7 XS1.1 | length 3.8
  Bottom Layer w0.66: D8.63 D8.64@149.021,4.021
  Bottom Layer w1.5: D8.64@149.021,4.021 149.021,7.75
  other v1: 158,2.55 15.7,5.863 24.299,8.137 20,8.625 31,9.25 42,9.25 47,9.25 129.875,9.5 131.625,9.5 34.55,10.87 61,12.25 137,12.25 49.45,12.8 70.625,20.708 71.376,20.708 72.125,20.708 72.875,20.708 88.625,20.708 89.376,20.708 90.125,20.708 90.875,20.708 106.625,20.708 107.375,20.708 108.125,20.708 108.875,20.708 70.25,21.25 71,21.25 71.75,21.25 72.5,21.25 73.25,21.25 88.25,21.25 89,21.25 89.75,21.25 90.5,21.25 91.25,21.25 106.25,21.25 107,21.25 107.75,21.25 108.5,21.25 109.25,21.25 70.625,21.792 71.374,21.792 72.124,21.792 72.874,21.792 88.625,21.792 89.375,21.792 90.124,21.792 90.874,21.792 106.625,21.792 107.374,21.792 108.124,21.792 108.874,21.792 112.75,21.963 112.75,22.8 112.75,23.637
  other v2: 160.5,18 160,18.75 161,18.75 160.5,19.5 161.5,19.5 162.5,19.5 157,20.25 158,20.25 159,20.25 160,20.25 161,20.25 162,20.25 156.5,21 157.5,21 158.5,21 159.5,21 160.5,21 161.5,21
LII_SW: J1.11 U5.6 | length 42
  Top Layer w0.2: U5.6 v1(157.35,4.85)
  Layer 1 w0.2: v1(157.35,4.85) 157.35,9.736 cw(c157.65,9.735) 157.438,9.947 164.923,17.433 ; J1.11 165.912,40.533 cw(c165.7,40.321) 166,40.321 166,29.152 166,29.15 cw(c165.7,29.151) 166,29.143 166,29.142 cw(c164.556,29.198) 165.573,28.172 ccw(c165.785,27.959) 165.534,28.124 165.533,28.122 165.31,27.778 ccw(c165.562,27.615) 165.297,27.754 165.252,27.669 ccw(c165.518,27.53) 165.245,27.654 165.207,27.571 ; 164.923,17.433 ccw(c164.43,17.929) 165.13,17.929 165.13,27.251 cw(c165.43,27.251) 165.131,27.271 165.133,27.308 cw(c165.432,27.289) 165.137,27.343 165.144,27.378 cw(c165.439,27.324) 165.15,27.406 165.165,27.459 ; 165.166,27.46 cw(c165.454,27.377) 165.173,27.482 165.199,27.551 cw(c165.48,27.446) 165.207,27.571
MISO: J1.8
MOSI: D6.3 D8.11 R14.2 | length 8.5
  Bottom Layer w0.2: D6.3 39.368,10.593 ccw(c39.668,10.593) 39.455,10.381 39.916,9.921 cw(c39.703,9.709) 40.003,9.709 40.003,7.421 ccw(c40.303,7.421) 40.091,7.209 40.61,6.69 cw(c40.397,6.478) 40.619,6.681 R14.2 D8.11
NetC2_1: C2.1 L2.2 U3.14 U3.16
NetC2_2: C2.2 D3.1 L2.4
NetC6_2: C6.2 U1.5 | length 1.9
  Bottom Layer w0.254: C6.2 U1.5
NetC7_2: C7.2 R5.1 | length 1.6
  Bottom Layer w0.254: C7.2 R5.1
NetC8_2: C8.2 U1.11 | length 2.8
  Bottom Layer w0.254: U1.11 C8.2 C8.2@71,26.25
NetC12_2: C12.2 U3.5 | length 1.9
  Bottom Layer w0.254: C12.2 U3.5
NetC13_1: C13.1 R1.1 R9.2 U3.9 | length 25.2
  Layer 2 w0.3: v1(104.5,24.75) 104.5,13.157 ccw(c105.307,13.157) 105.307,12.35 v1(110.751,12.35)
  Bottom Layer w0.254: R9.2 104.5,23.4 104.5,23.603 v1(104.5,24.75) 105.342,24.75 cw(c105.342,24.369) 105.612,24.638 105.864,24.386 cw(c105.594,24.117) 105.975,24.128 105.987,23.725 cw(c105.66,23.715) 105.987,23.718 105.996,23.4 U3.9@106,23.25 ; v1(110.751,12.35) R1.1 C13.1
NetC14_1: C14.1 R2.2 R4.1 U1.9 | length 23.8
  Layer 2 w0.254: v1(68.5,24.75) 68.5,14.964 ccw(c69.214,14.964) 69.214,14.25 v1(75.201,14.25)
  Bottom Layer w0.254: R2.2@68.5,23.299 68.5,23.603 v1(68.5,24.75) 69.342,24.75 cw(c69.342,24.369) 69.612,24.638 69.864,24.386 cw(c69.594,24.117) 69.975,24.128 69.987,23.725 cw(c69.66,23.715) 69.987,23.718 U1.9@70,23.25 ; v1(75.201,14.25) C14.1 R4.1
NetC15_2: C15.2 R3.1 | length 1.6
  Bottom Layer w0.254: C15.2 R3.1
NetC22_2: C22.2 U3.11 | length 2.8
  Bottom Layer w0.254: U3.11 C22.2 C22.2@107,26.25
NetC25_1: C25.1 R8.1 R11.2 U2.9 | length 23.7
  Layer 2 w0.3: v1(86.5,24.75) 86.5,21.5 86.5,15.057 ccw(c87.307,15.057) 87.307,14.25 v1(93.201,14.25)
  Bottom Layer w0.254: R11.2@86.5,23.299 86.5,23.603 v1(86.5,24.75) 87.342,24.75 cw(c87.342,24.369) 87.612,24.638 87.864,24.386 cw(c87.594,24.117) 87.975,24.128 87.987,23.725 cw(c87.66,23.715) 87.987,23.718 U2.9@88,23.25 ; v1(93.201,14.25) C25.1 R8.1
NetC26_2: C26.2 U2.5 | length 1.9
  Bottom Layer w0.254: C26.2 U2.5
NetC27_2: C27.2 R21.1 | length 1.6
  Bottom Layer w0.254: C27.2 R21.1
NetC28_2: C28.2 U2.11 | length 2.8
  Bottom Layer w0.254: U2.11 C28.2 C28.2@89,26.25
NetD1_1: D1.1 L3.2 U2.14 U2.16
NetD2_1: D2.1 L1.2 U1.14 U1.16
NetD8_9: D8.9 R16.2 | length 2.5
  Bottom Layer w0.66: D8.9 R16.2
NetD8_21: D8.21 R17.2 | length 2.5
  Bottom Layer w0.66: D8.21 R17.2
NetD8_59: D8.59 R18.2 | length 2.5
  Bottom Layer w0.66: D8.59 R18.2
NetJ1_2: J1.2 R12.1 | length 155.5
  Layer 2 w0.2: v1(45,9.25) 42.687,11.563 cw(c42.9,11.774) 42.6,11.774 42.6,29.129 cw(c42.9,29.129) 42.688,29.34 45.283,31.936 53.579,40.232 cw(c53.791,40.02) 53.791,40.32 123.805,40.32 ; 123.806,40.32 cw(c123.806,40.02) 124.018,40.232 131.749,32.501 cw(c131.538,32.288) 131.752,32.498 131.755,32.495 131.757,32.493 ccw(c132.886,33.621) 132.1,32.232 cw(c131.951,31.971) 132.115,32.223 ccw(c132.775,33.225) 132.775,32.025 132.882,32.025 ccw(c132.886,33.621) 132.891,32.025 161.45,32.025 ; 161.451,32.025 cw(c161.451,31.725) 161.663,31.937 163.226,30.374 ccw(c163.439,30.585) 163.439,30.285 J1.2
  Bottom Layer w0.2: R12.1 v1(45,9.25)
NetJ1_3: J1.3 R13.2 | length 152.5
  Layer 2 w0.2: v1(43,9.25) 43,10.558 43,10.56 ccw(c42.7,10.56) 42.911,10.773 42.408,11.277 cw(c42.9,11.774) 42.2,11.774 42.2,29.129 cw(c42.9,29.129) 42.405,29.623 45.001,32.219 cw(c45.283,31.936) 45.002,32.221 53.295,40.513 cw(c53.791,40.02) 53.791,40.72 123.801,40.72 cw(c123.806,40.02) 124.302,40.514 132.031,32.785 cw(c131.75,32.5) 132.034,32.781 cw(c131.75,32.5) 132.037,32.779 ccw(c132.886,33.621) 132.303,32.577 132.305,32.575 cw(c132.16,32.313) 132.329,32.561 ccw(c132.775,33.225) 132.775,32.425 132.882,32.425 ccw(c132.886,33.621) 132.889,32.425 161.45,32.425 cw(c161.451,31.725) 161.873,32.283 161.89,32.27 cw(c161.713,32.028) 161.926,32.24 161.942,32.223 cw(c161.451,31.725) 161.947,32.218 161.948,32.217 162.455,31.71 ccw(c162.669,31.921) 162.504,31.67 162.604,31.604 ccw(c162.769,31.855) 162.621,31.594 ccw(c162.769,31.855) 162.769,31.555 J1.3
  Bottom Layer w0.2: R13.2 v1(43,9.25)
NetJ1_4: J1.4 R14.1 | length 155.4
  Layer 2 w0.2: v1(41,9.25) 41,10.56 cw(c41.3,10.56) 41.087,10.772 41.593,11.278 ccw(c41.1,11.774) 41.756,11.529 41.781,11.596 ccw(c41.5,11.701) 41.8,11.701 41.8,27.439 cw(c44.629,27.441) 41.8,27.445 41.8,29.129 cw(c42.9,29.129) 42.122,29.907 44.717,32.501 cw(c45.283,31.936) 44.72,32.504 ; 44.72,32.504 ccw(c44.508,32.717) 44.721,32.506 53.011,40.796 cw(c53.791,40.02) 53.792,41.12 123.803,41.12 cw(c123.806,40.02) 124.585,40.796 132.313,33.068 cw(c131.75,32.5) 132.315,33.066 cw(c131.75,32.5) 132.322,33.059 ccw(c132.886,33.621) 132.51,32.919 cw(c132.37,32.654) 132.543,32.899 ccw(c132.775,33.225) 132.775,32.825 132.883,32.825 ccw(c132.886,33.621) 132.889,32.825 161.45,32.825 cw(c161.451,31.725) 161.639,32.809 cw(c161.451,31.725) 161.644,32.808 ccw(c161.696,33.103) 161.74,32.807 ; 161.741,32.807 161.848,32.822 cw(c161.89,32.525) 161.89,32.825 J1.4
  Bottom Layer w0.2: R14.1 v1(41,9.25)
NetJ1_5: J1.5 R15.2 | length 154.5
  Layer 2 w0.2: v1(39,9.25) 41.313,11.563 ccw(c41.1,11.774) 41.4,11.774 41.4,27.441 cw(c44.629,27.441) 41.4,27.445 41.4,29.129 cw(c42.9,29.129) 41.84,30.19 44.433,32.782 cw(c45.283,31.936) 44.437,32.787 52.727,41.077 cw(c53.791,40.02) 53.794,41.52 123.802,41.52 cw(c123.806,40.02) 124.869,41.078 132.594,33.353 ; 132.595,33.352 cw(c131.75,32.5) 132.606,33.341 132.608,33.339 ccw(c132.886,33.621) 132.7,33.271 cw(c132.37,32.654) 132.716,33.263 ccw(c132.861,33.525) 132.859,33.225 161.45,33.225 cw(c161.451,31.725) 161.513,33.224 ccw(c161.524,33.523) 161.735,33.31 162.433,34.008 cw(c162.644,33.795) 162.644,34.095 J1.5
  Bottom Layer w0.2: R15.2 v1(39,9.25)
NetL4_1: L4.1 XS1.2 | length 6.8
  Bottom Layer w1: L4.1 XS1.2
NetR3_2: R3.2 U3.8 | length 1.9
  Bottom Layer w0.254: R3.2 U3.8
NetR5_2: R5.2 U1.8 | length 1.9
  Bottom Layer w0.254: R5.2 U1.8
NetR6_2: R6.2 U1.10 | length 3.1
  Bottom Layer w0.254: R6.2 69.541,25.997 69.541,25.616 ccw(c69.922,25.616) 69.653,25.347 70.389,24.611 cw(c70.119,24.342) 70.5,24.342 U1.10@70.5,23.5
NetR7_2: R7.2 U3.10 | length 3.1
  Bottom Layer w0.254: R7.2 105.541,25.997 105.541,25.616 ccw(c105.922,25.616) 105.653,25.347 106.389,24.611 cw(c106.119,24.342) 106.5,24.342 U3.10@106.5,23.5
NetR19_1: R19.1 U6.2 | length 1.7
  Bottom Layer w0.2: R19.1 U6.2
NetR21_2: R21.2 U2.8 | length 1.9
  Bottom Layer w0.254: R21.2 U2.8
NetR22_2: R22.2 U2.10 | length 3.1
  Bottom Layer w0.254: R22.2 87.541,25.997 87.541,25.616 ccw(c87.922,25.616) 87.653,25.347 88.389,24.611 cw(c88.119,24.342) 88.5,24.342 U2.10@88.5,23.5
NetR23_1: R23.1 U5.4 | length 1.6
  Top Layer w0.2: U5.4 R23.1
SCK: D4.3 D8.13 R12.2 | length 8.4
  Bottom Layer w0.2: D8.13 R12.2 45.395,6.681 46.081,7.366 ccw(c45.868,7.578) 46.168,7.578 D4.3
VCC: C9.2 C10.2 C11.2 C13.2 C30.2 D3.2 R1.2 U3.7 U4.2 U6.6 | length 122.4
  Layer 1 w1: v1(112,12) v1(113.75,12)
  Layer 1 w1.5: 21.25,6 25.353,6 ccw(c25.35,8.25) 25.944,6.08 27.007,6.371 cw(c27.601,4.201) 27.598,6.451 65.95,6.451 119.921,6.451 v1(127.049,6.451)
  Layer 2 w0.3: v1(106.75,18.1) 106.75,14.357 ccw(c107.557,14.357) 107.557,13.55 111.193,13.55 cw(c111.193,12.743) 112,12.743 v1(112,12)
  Bottom Layer w0.254: U3.7 106.52,19.079 106.52,18.423 106.75,18.194 v1(106.75,18.1)
  Bottom Layer w0.66: v1(127.049,6.451) C9.2 ; C9.2 129.63,6.451 129.8,6.621 U4.2
  other v1: 21.5,5.75 22.25,5.75 23,5.75 21.125,6.292 21.875,6.292 112.437,11.475 113.312,11.475 112.875,12
VDD: C5.2 C16.2 C17.2 C18.2 C29.2 D8.6 D8.14 D8.58 R16.1 U4.1 U5.1 | length 150.8
  Top Layer w0.35: v1@154.497,1.5 U5.1
  Layer 2 w0.66: D8.6 31,2.49 ccw(c31.99,2.49) 31.99,1.5 134.98,1.5 ; 47,1.5 D8.14 ; D8.58@134.98,3.98 134.98,1.5 ; v1@154.498,1.5 134.98,1.5 ; v1@154.498,1.501 cw(c154.217,0.551) v1(154.5,1.5)
  Bottom Layer w0.254: U4.1@131.7,6.824 U4.1
  Bottom Layer w0.66: D8.6 C16.2 32.791,6.451 ccw(c32.791,7.441) 33.489,6.739 34.461,7.711 cw(c35.16,7.01) 35.16,8 R16.1 ; D8.14 C18.2 ; U4.1@131.7,6.824 132.073,6.451 C5.2 C17.2 D8.58 D8.58@134.98,3.98
VFIL: C31.2 D8.1 D8.2 D8.3 D8.4 U6.1
VHG: C1.2 C14.2 C19.2 D2.2 R4.2 R17.1 | length 18.8
  Layer 1 w0.66: v1(61,8.725) 63.985,11.71 cw(c64.685,11.01) 64.685,12 v1(76,12) v1(77,12)
  Bottom Layer w0.66: R17.1 v1(61,8.725) C19.2
VHP: C20.2 C24.2 C25.2 D1.2 R8.2 R18.1 | length 47.3
  Layer 1 w0.66: v1(94,12) 96.015,12 ccw(c96.015,12.99) 96.714,12.289 98.135,13.71 cw(c98.835,13.01) 98.835,14 128.59,14 cw(c128.59,13.01) 129.29,13.71 133.985,9.015 ccw(c134.685,9.715) 134.685,8.725 v1(137,8.725)
  Bottom Layer w0.66: R18.1 v1(137,8.725) C20.2
  other v1: 95,12
VIN: C3.1 C4.1 C21.2 C23.1 L1.1 L2.3 L3.1 L4.2 U1.1 U1.3 U2.1 U2.3 U3.1 U3.3
  other v1: 72.925,17.881 74.075,17.881 90.925,17.881 92.075,17.881 108.925,17.881 110.075,17.881 73.5,18.3 91.5,18.3 109.5,18.3 74.075,18.719 92.075,18.719 110.075,18.719 74.075,19.556 92.075,19.556 110.075,19.556 74.75,34.5 75.75,34.5 76.75,34.5 77.75,34.5 78.75,34.5 92.75,34.5 93.75,34.5 94.75,34.5 95.75,34.5 96.75,34.5 110.75,34.5 111.75,34.5 112.75,34.5 113.75,34.5 114.75,34.5
  other v2: 146.5,19.5 147.5,19.5 148.5,19.5 149.5,19.5 150.5,19.5 151.5,19.5 152.5,19.5 147,20.25 148,20.25 149,20.25 150,20.25 151,20.25 152,20.25 153,20.25 146.5,21 147.5,21 148.5,21 149.5,21 150.5,21 151.5,21 152.5,21 153.5,21
pads on no net: C9.1 D4.2 D5.2 D6.2 D7.2 D8.7 D8.8 D8.15 D8.16 D8.18 D8.20 D8.22 D8.23 D8.24 D8.25 D8.26 D8.27 D8.28 D8.29 D8.30 D8.31 D8.32 D8.33 D8.34 D8.35 D8.36 D8.37 D8.38 D8.39 D8.40 D8.41 D8.42 D8.43 D8.44 D8.45 D8.46 D8.47 D8.48 D8.49 D8.50 D8.51 D8.52 D8.53 D8.54 D8.55 D8.56 D8.57 J1.MH1 J1.MH2 L1.MP1 L1.MP2 L3.MP1 L3.MP2 MP1.1 MP2.1 MP3.1 MP4.1 U1.6 U2.6 U3.6 U5.3 U5.5 U6.3 XS1.0

## Polygon pours and split planes (outlines as drawn)
GND on Top Layer "NONET_L-01_P-001" (solid, remove dead copper, pour order 65): 0,0 0,60 170,60 170,0
VCC on Bottom Layer "NONET_L-01_P-001" (solid, remove dead copper, pour order 79): 22.029,8.15 20.7,8.15 20.7,5.25 23.5,5.25 23.5,7.6 23.35,7.75 22.459,7.75
VFIL on Bottom Layer "NONET_L-01_P-001" (solid, remove dead copper, pour order 78): 18.071,8.15 19.3,8.15 19.3,4.611 16.5,4.611 16.5,7.5 16.75,7.75 17.641,7.75
NetD2_1 on Bottom Layer "NONET_L-01_P-001" (solid, remove dead copper, pour order 66): 72.5,26.5 79.25,26.5 79.5,26.25 79.5,22.75 79.25,22.5 72.5,22.5 72.25,22.75 72.25,26.25
VIN on Bottom Layer "NONET_L-01_P-001" (solid, remove dead copper, pour order 67): 72.75,16.75 73,16.5 74.5,16.5 74.5,20 72.25,20 72,19.75 72,18.25 72.75,17.5
VIN on Bottom Layer "NONET_L-01_P-001" (solid, remove dead copper, pour order 68): 79.25,32 79,31.75 74.5,31.75 74.25,32 74.25,34.75 74.5,35 79,35 79.25,34.75
VHG on Bottom Layer "NONET_L-01_P-001" (solid, remove dead copper, pour order 69): 74.75,20 75,20.25 78,20.25 78.25,20 78.25,12 77.75,11.5 75.25,11.5 74.75,12
GND on Bottom Layer "GND_L04_P082" (solid, remove dead copper, pour order 82): 81.75,35.5 65.75,35.5 65.75,10.5 81.75,10.5
NetD1_1 on Bottom Layer "NONET_L-01_P-001" (solid, remove dead copper, pour order 70): 90.5,26.5 97.25,26.5 97.5,26.25 97.5,22.75 97.25,22.5 90.5,22.5 90.25,22.75 90.25,26.25
VIN on Bottom Layer "NONET_L-01_P-001" (solid, remove dead copper, pour order 71): 90.75,16.75 91,16.5 92.5,16.5 92.5,20 90.25,20 90,19.75 90,18.25 90.75,17.5
VIN on Bottom Layer "NONET_L-01_P-001" (solid, remove dead copper, pour order 72): 97.25,32 97,31.75 92.5,31.75 92.25,32 92.25,34.75 92.5,35 97,35 97.25,34.75
VHP on Bottom Layer "NONET_L-01_P-001" (solid, remove dead copper, pour order 73): 92.75,20 93,20.25 96,20.25 96.25,20 96.25,12 95.75,11.5 93.25,11.5 92.75,12
GND on Bottom Layer "GND_L04_P083" (solid, remove dead copper, pour order 83): 99.75,35.5 83.75,35.5 83.75,10.5 99.75,10.5
NetC2_1 on Bottom Layer "NONET_L-01_P-001" (solid, remove dead copper, pour order 74): 110.25,22.755 108.245,22.755 108,23 108,31.25 108.25,31.5 109.75,31.5 110,31.25 110,29.25 110,24.5 110.25,24.25 111.75,24.25 112,24 112,21.712 111.788,21.5 110.462,21.5 110.25,21.712
VIN on Bottom Layer "NONET_L-01_P-001" (solid, remove dead copper, pour order 75): 108.75,16.75 109,16.5 110.5,16.5 110.5,20 108.25,20 108,19.75 108,18.25 108.75,17.5
NetC2_2 on Bottom Layer "NONET_L-01_P-001" (solid, remove dead copper, pour order 76): 115.5,21.25 115.5,18.5 115.75,18.25 117.25,18.25 117.5,18.5 117.5,31.25 117.25,31.5 115.75,31.5 115.5,31.25 115.5,29.25 115.5,24.5 115.25,24.25 113.75,24.25 113.5,24 113.5,21.712 113.712,21.5 115.25,21.5
VIN on Bottom Layer "NONET_L-01_P-001" (solid, remove dead copper, pour order 77): 115.25,32 115,31.75 110.5,31.75 110.25,32 110.25,34.75 110.5,35 115,35 115.25,34.75
VCC on Bottom Layer "NONET_L-01_P-001" (solid, remove dead copper, pour order 80): 111.75,20.5 114,20.5 114.25,20.25 114.25,11.25 114,11 111.75,11 111.5,11.25 111.5,20.25
GND on Bottom Layer "GND_L04_P081" (solid, remove dead copper, pour order 81): 118.25,35.5 101.75,35.5 101.75,10.5 118.25,10.5
GND on Bottom Layer "NONET_L-01_P-001" (solid, remove dead copper, pour order 87): 0,0 0,60 170,60 170,0